# Altium PCB EPS 2023-24.PcbDoc (part 2 of 2)
Units mm, origin at the board's own origin, x right, y up, seen from the top; angles counter-clockwise.
Board outline 95.88 x 90.17 mm, 2 copper layers (Top, Bottom); 258 components, 125 nets, 766 pads, 194 vias.
Unrouted connection lines stored in the file: 96.
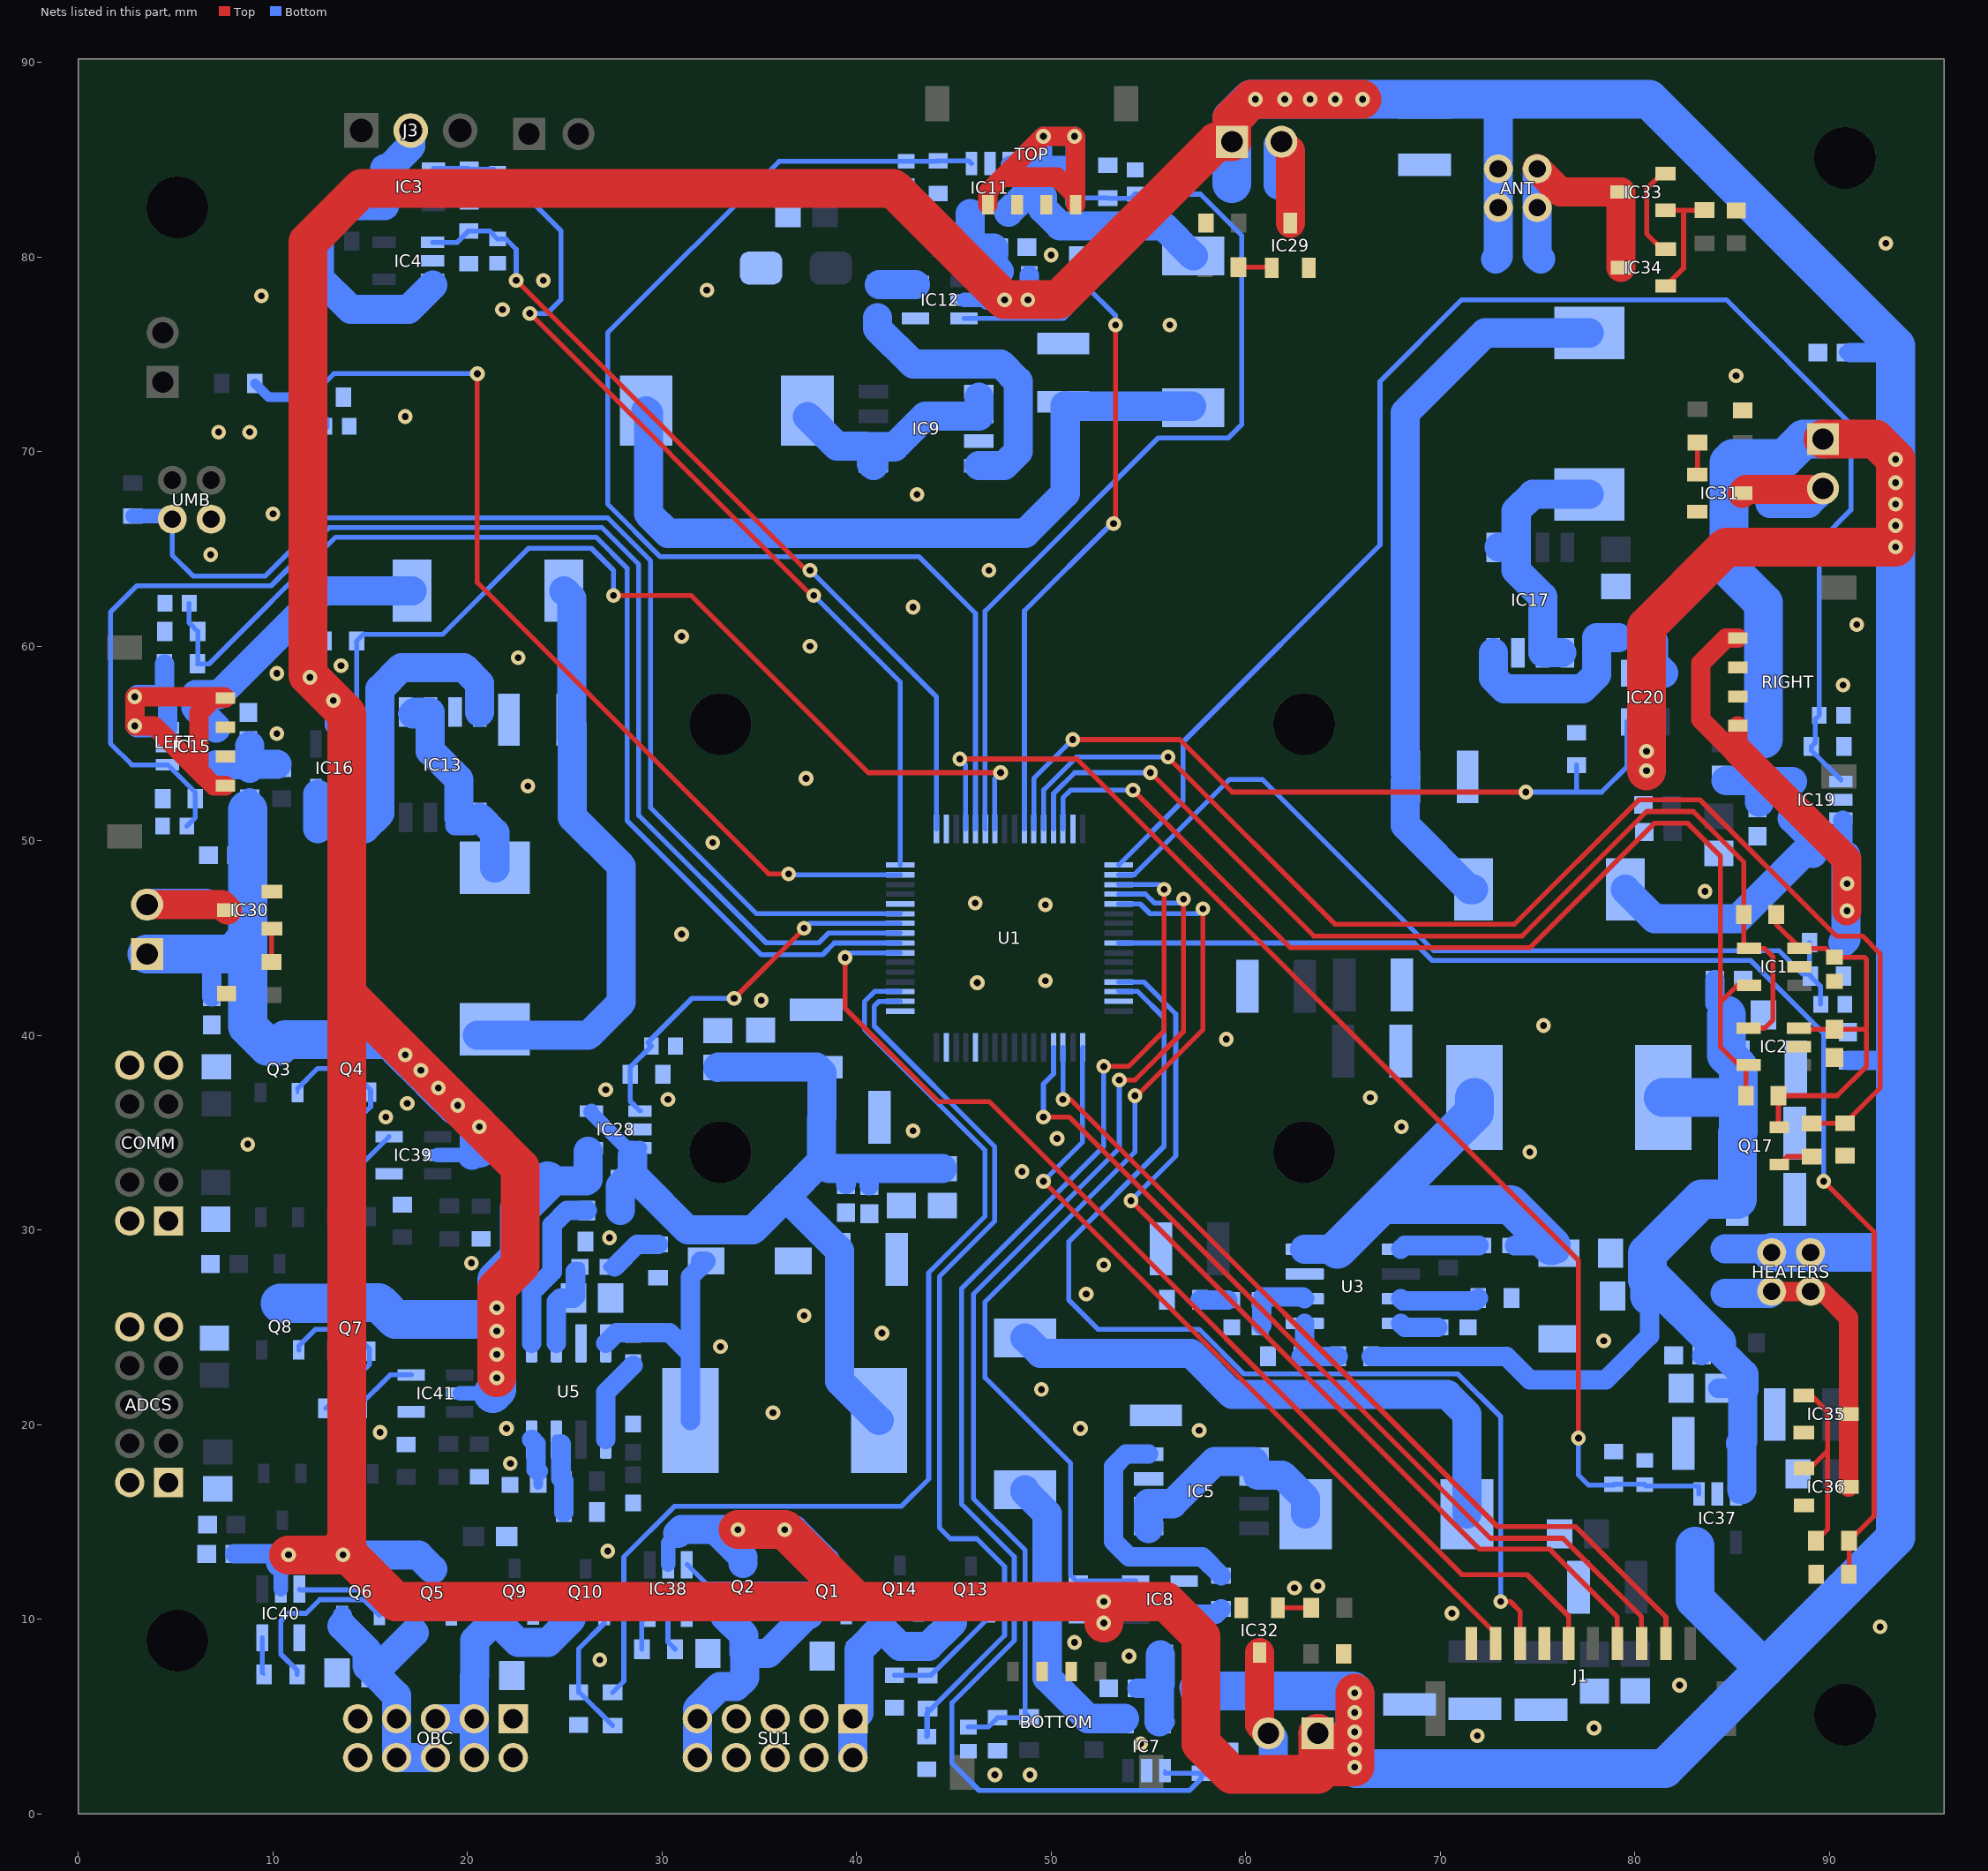
[diagram p2: the nets of this part, all layers, seen from the top]

## Via types
v1: diameter 0.756/0.756 (per signal layer), hole 0.35, Top to Bottom, 194 vias

## Nets (pads, with @x,y where several pads share a name; then routed paths per layer and width w, separated by ;. In a path a pad name is that pad's centre, name@x,y a point inside that pad or via, vN(x,y) a via of type N, cw(c..) or ccw(c..) an arc to the next point about the centre after c; other vN are vias at no path point) (continued)
GND: ADCS.1 ADCS.2 ADCS.9 ADCS.10 BOTTOM.2 BOTTOM.3 C1.1 C2.1 C3.1 C4.1 C5.1 C6.1 C7.1 C8.1 C9.1 C10.1 C11.1 C12.1 C13.1 C14.2 C15.1 C16.1 C17.2 C18.1 C19.1 C20.2 C21.1 C22.1 C23.2 C24.1 C25.1 C26.1 C27.1 C28.1 C29.1 C30.1 C31.1 C32.1 C33.1 C34.1 C35.1 C36.1 C37.1 C38.1 C39.1 C40.2 C41.2 C42.1 C43.1 C44.2 C45.1 C46.2 C47.1 C49.1 C50.1 C51.2 C52.2 C53.1 C54.1 C55.1 C56.1 C57.1 C61.1 C62.1 C63.2 C64.2 C65.1 C66.1 C67.1 C70.1 C71.1 C72.1 C73.1 C74.1 C75.1 C76.1 C77.1 C78.2 C79.1 C81.1 C82.1 C83.2 C85.2 C87.2 C88.2 C89.2 C90.1 C91.2 C93.1 COMM.1 COMM.2 COMM.9 COMM.10 D1.A D8.A D9.2 IC1.2 IC2.2 IC3.2 IC4.2 IC5.3 IC7.2 IC8.4 IC9.3 IC11.2 IC12.4 IC13.3 IC15.2 IC16.4 IC17.3 IC19.2 IC20.4 IC28.2 IC29.2 IC30.2 IC31.2 IC32.2 IC33.2 IC34.2 IC35.2 IC36.2 IC37.2 IC38.4 IC39.4 IC40.4 IC41.4 J1.7 J1.10 LEFT.2 LEFT.3 OBC.1 OBC.2 OBC.9 OBC.10 R2.1 R4.1 R7.2 R10.1 R13.1 R14.2 R15.1 R20.1 R22.1 R23.1 R24.1 R30.1 R32.1 R33.1 R34.1 R40.1 R42.1 R43.1 R44.1 R46.2 R51.1 R53.1 R55.1 R57.1 R59.1 R61.2 R63.2 R68.1 R70.2 R72.2 R74.2 R76.2 R81.1 R82.1 R83.1 R86.2 R89.1 RIGHT.2 RIGHT.3 SU1.3 SU1.4 SU1.5 SU1.6 SU1.7 SU1.8 TOP.2 TOP.3 U1.12 U1.18 U1.31 U1.47 U1.60 U1.63 U3.7 U5.7 UMB.4 | length 4.9
  Top w0.254: IC33.2@81.57,84.29 81.39,84.29 80.6,83.5 80.6,81.19 81.38,80.41 IC34.2@81.58,80.41
  other v1: 47.1,2 48.9,2 54.6,3.6 71.9,4 77.9,4.4 82.3,6.6 26.8,7.9 54,8.1 51.2,8.8 92.6,9.6 70.6,10.3 62.5,11.6 63.7,11.7 27.2,13.5 22.2,18 15.5,19.6 57.6,19.7 22,19.8 51.5,19.8 35.7,20.6 49.5,21.8 33,24 78.4,24.3 41.3,24.7 37.3,25.6 51.8,26.7 52.7,28.2 20.2,28.3 27.3,29.6 48.5,33 74.6,34 8.7,34.4 50.3,34.7 42.9,35.1 68,35.3 15.8,35.8 16.9,36.5 30.3,36.7 66.4,36.8 27.1,37.2 59,39.8 75.3,40.5 35.1,41.8 46.2,42.7 49.7,42.8 31,45.2 49.7,46.7 46.1,46.8 83.6,47.4 32.6,49.9 23.1,52.8 37.4,53.2 10.2,55.5 90.7,58 10.2,58.6 13.5,59 22.6,59.4 37.6,60 31,60.5 91.4,61.1 42.9,62 46.8,63.9 6.8,64.7 10,66.8 43.1,67.8 7.2,71 8.8,71 16.8,71.8 85.2,73.9 56.1,76.5 21.8,77.3 9.4,78 32.3,78.3 23.9,78.8 50,80.1 92.9,80.7
HEATERS: R62.1 R63.1 U1.41 | length 67.6
  Top w0.254: v1(89.7,32.5) 92.3,29.9 92.3,15.307 R62.1@91.013,14.02 91.013,12.326 R63.1@90.997,12.31
  Bottom w0.254: U1.41@53.473,44.746 68.673,44.746 69.573,43.846 85.953,43.846 89.7,40.1 v1(89.7,32.5)
I2CRESET: R85.1 R86.1 U1.28 | length 66.3
  Top w0.254: v1(56,54.3) 64.6,45.7 73.8,45.7 80.2,52.1 83.352,52.1 90.352,45.1 91.7,45.1 92.6,44.2 92.6,37.287 R86.1@90.8,35.487 89.104,35.487 R85.1@89.09,35.473
  Bottom w0.254: U1.28@49.613,50.613 49.613,52.613 51.3,54.3 v1(56,54.3)
I3_3V: C10.2 IC37.1 R68.2 U1.20 | length 64.2
  Top w0.254: v1(45.3,54.2) 51.33,54.2 77.1,28.43 v1(77.1,19.3)
  Bottom w0.254: v1(45.3,54.2) 45.599,53.901 U1.20@45.599,50.613 ; v1(77.1,19.3) 77.1,17.4 77.61,16.89 78.943,16.89 78.9,16.933 80.485,16.933 C10.2@80.51,16.908 80.578,16.84 83.29,16.84 IC37.1@83.29,16.44
I5V: C1.2 IC28.1 R51.2 U1.10 | length 19.8
  Top w0.254: v1(33.7,41.9) v1(37.3,45.5)
  Bottom w0.254: IC28.1@28.87,36.11 28.363,36.617 28.363,37.99 28.363,38.365 C1.2@29.448,39.45 29.267,39.631 31.536,41.9 v1(33.7,41.9) ; v1(37.3,45.5) 37.562,45.762 U1.10@42.247,45.762
IBAT+: C13.2 IC3.1 R2.2 U1.16 | length 49.6
  Top w0.254: v1(23.2,77.1) 37.7,62.6 v1(37.8,62.6)
  Bottom w0.254: IC3.1@18.24,84.55 20.037,84.55 R2.2@20.09,84.497 21.345,84.497 C13.2@21.54,84.302 21.84,84.302 24.8,81.342 24.8,77.8 24.1,77.1 v1(23.2,77.1) ; v1(37.8,62.6) 42.247,58.153 U1.16@42.247,48.759
IBAT-: C9.2 IC4.1 R7.1 U1.17 | length 43.8
  Top w0.254: v1(22.5,78.8) 37.4,63.9 v1(37.6,63.9)
  Bottom w0.254: IC4.1@18.21,80.75 19.473,80.75 R7.1@20.06,81.337 21.125,81.337 C9.2@21.54,80.922 21.978,80.922 22.5,80.4 v1(22.5,78.8) ; v1(37.6,63.9) 44.101,57.399 U1.17@44.101,50.613
INCURRENT1: C7.2 IC19.1 R40.2 U1.33 | length 78.8
  Bottom w0.152: IC19.1@90.59,53.05 IC19.1@90.59,53.123
  Bottom w0.254: U1.33@53.473,48.759 56.773,52.059 56.773,55.073 66.9,65.2 66.9,73.6 71.1,77.8 84.7,77.8 91.1,71.4 91.1,67 89.478,65.378 C7.2@89.478,56.45 89.273,56.245 89.273,55.04 R40.2@89.073,54.84 89.073,54.64 IC19.1@90.59,53.123
INCURRENT2: C2.2 IC15.1 R30.2 U1.9 | length 73.1
  Bottom w0.254: C2.2@5.572,50.75 6.007,51.185 R30.2@6.007,52.16 6.007,52.473 IC15.1@4.58,53.9 2.743,53.9 1.643,55 1.643,61.743 3,63.1 9.9,63.1 12.9,66.1 26.9,66.1 28.8,64.2 28.8,51.3 35.346,44.754 38.047,44.754 38.547,45.254 U1.9@42.247,45.254
INCURRENT3: C11.2 IC11.1 R20.2 U1.21 | length 63.5
  Bottom w0.254: IC11.1@45.9,84.8 45.763,84.937 R20.2@44.19,84.937 44.165,84.912 C11.2@42.54,84.912 36.012,84.912 27.2,76.1 27.2,67.3 29.9,64.6 43.2,64.6 46.107,61.693 U1.21@46.107,50.613
INCURRENT4: C5.2 IC7.1 R10.2 U1.35 | length 72.3
  Top w0.254: v1(52.7,38.4) 53.969,38.4 55.8,40.231 v1(55.8,47.5)
  Bottom w0.152: IC7.1@55.85,2.22 55.85,2.1 IC7.1@55.867,2.083 ; R10.2@57.71,2.083 R10.2@57.775,2.018
  Bottom w0.254: v1(52.7,38.4) 52.7,34.3 45.4,27 45.4,15.9 48.1,13.2 48.1,8.9 44.9,5.7 44.9,2.592 46.3,1.192 57.095,1.192 57.71,1.807 R10.2@57.71,2.083 IC7.1@55.867,2.083 ; U1.35@53.473,47.743 55.557,47.743 v1(55.8,47.5) ; R10.2@57.775,2.018 C5.2@59.2,2.018
LEFT: IC15.3 LEFT.1 LEFT.4 R29.1 R31.2 | length 25.1
  Top w1: LEFT.4@7.56,52.83 6.96,52.83 6.2,53.59 ; 6.2,53.59 3.89,55.9 v1(2.9,55.9) v1(2.9,57.4) 7.49,57.4 LEFT.1@7.56,57.33 6.96,57.33 6.2,56.57 6.2,53.59
  Bottom w0.254: v1(2.9,55.9) 4.48,55.9 IC15.3@4.58,55.8 ; R31.2@4.42,59.09 R31.2@4.43,59.08
  Bottom w1: v1(2.9,55.9) 2.998,55.802 4.58,55.802 4.58,57.36 R29.1@4.43,57.51 ; v1(2.9,57.4) 3.01,57.51 R29.1@4.43,57.51 ; R31.2@4.43,59.08 R29.1@4.43,57.51
N$1: C49.2 C50.2 C51.1 C52.1 C53.2 C54.2 C55.2 C85.1 C89.1 IC28.3 IC28.5 L7.1 R45.1 R50.1 | length 52.2
  Bottom w0.254: IC28.3@28.574,34.21 IC28.3@28.87,34.21
  Bottom w0.75: IC28.5@26.37,36.11 26.322,36.062 28.174,34.21 IC28.3@28.574,34.21 ; R50.1@27.79,32.69 R50.1@27.79,32.59 ; R50.1@28.19,32.59 R50.1@27.79,32.59 ; 28.474,33.814 IC28.3@28.87,34.21 IC28.3@28.81,34.21 ; 28.727,32.59 R50.1@27.79,32.59
  Bottom w1: C49.2@39.45,32.334 39.45,33 39.6,33.15 ; 40.5,33.15 40.65,33 C50.2@40.65,32.284
  Bottom w1.5: R45.1@27.853,31 27.853,32.253 28.19,32.59 28.474,32.874 28.474,33.814 ; 28.727,32.59 31.316,30.001 34.658,30.001 36.358,31.701 ; C51.1@32.86,38.35 32.88,38.37 C52.1@35.06,38.37 35.065,38.365 C54.2@37.92,38.365 38.215,38.07 C55.2@38.215,35.78 38.189,35.754 38.189,33.532 ; L7.1@41.15,20.2 39.115,22.235 C53.2@39.115,28.48 39.115,28.944 36.358,31.701 ; C85.1@44.4,33.15 C89.1@42.3,33.15 40.5,33.15 39.6,33.15 38.571,33.15 38.189,33.532 ; 36.358,31.701 38.189,33.532
N$2: C47.2 C61.2 C62.2 C63.1 C64.1 C65.2 C66.2 C67.2 C87.1 C88.1 IC37.3 L8.1 R12.1 R67.1 | length 58.1
  Bottom w0.5: IC37.3@85.19,16.44 IC37.3@85.29,16.44
  Bottom w1: R12.1@66.453,23.5 73.4,23.5 74.6,22.3 78.5,22.3 80.75,24.55 C87.1@80.75,26.6 ; C61.2@83.434,23.55 83.651,23.767 84.412,23.767 84.412,23.972 R67.1@84.64,24.2 84.2,24.2 ; C62.2@84.116,42.85 84.116,41.634 C63.1@84.71,41.04 ; C64.1@84.27,21.86 85.54,21.86 85.6,21.8 85.535,21.735 ; IC37.3@85.29,16.44 85.49,16.64 ; C47.2@85.435,19.02 85.435,18.92 C47.2@85.49,18.865
  Bottom w1.5: R67.1@84.412,24.067 84.412,23.767 85.6,22.58 85.6,21.8 ; C47.2@85.435,19.02 85.535,19.12 85.535,21.735 ; 85.49,16.64 C47.2@85.49,18.865
  Bottom w2: C87.1@80.75,26.6 80.75,27.35 ; L8.1@81.45,36.8 85.215,36.8 85.315,36.7 ; 84.2,24.2 80.9,27.5 80.75,27.35 ; C63.1@84.71,41.04 84.71,38.985 C66.2@85.315,38.38 85.315,36.7 ; 80.75,27.35 80.652,27.447 80.652,27.827 80.65,27.83 C88.1@80.65,28.8 83.43,31.58 C67.2@85.265,31.58 C65.2@85.265,34.98 85.315,35.03 85.315,36.7
N$4: ANT.1 ANT.2 D6.2 IC33.3 IC34.3 | length 13.4
  Top w0.152: IC33.3@79.27,83.34 IC33.3@79.28,83.33
  Top w1.5: ANT.1@74.98,84.53 76.17,83.34 IC33.3@79.27,83.34 ; IC34.3@79.28,79.46 IC33.3@79.28,83.33
  Bottom w1.5: ANT.1@74.98,84.53 ANT.2@74.98,82.53 74.98,80.06 D6.2@75.15,79.89
N$6: D7.2 HEATERS.1 HEATERS.2 IC35.3 IC36.3 | length 15.7
  Top w1: HEATERS.2@87.03,26.84 HEATERS.1@89.03,26.84 89.633,26.84 90.98,25.493 IC35.3@90.98,20.54 90.98,16.8 IC36.3@90.99,16.79
  Bottom w1.5: D7.2@84.64,26.73 86.92,26.73 HEATERS.2@87.03,26.84
N$7: R33.2 R35.1 U3.3 | length 4.1
  Bottom w1: U3.3@67.97,26.465 68.088,26.347 R35.1@70.4,26.347 71.794,26.347 R33.2@71.947,26.5
N$8: C4.2 C78.1 IC1.3 IC2.3 Q17.2 R87.2 R88.2 | length 21.7
  Top w0.254: R88.2@87.267,46.2 87.267,45.7 88.455,44.512 88.502,44.512 IC1.3@88.46,44.47 89.792,44.47 C4.2@90.25,44.012 91.788,44.012 91.9,43.9 91.9,40.314 ; Q17.2@87.42,35.275 87.377,35.318 R87.2@87.377,36.9 90.4,36.9 91.9,38.4 91.9,40.314 ; IC2.3@88.44,40.37 88.496,40.314 C78.1@90.25,40.314 91.9,40.314
N$9: C80.2 U3.1 | length 4.3
  Bottom w0.5: C80.2@71.976,29.2 C80.2@72.176,29.2
  Bottom w1: U3.1@67.97,29.005 68.165,29.2 C80.2@71.976,29.2
N$10: R12.2 R14.1 U3.5 | length 3.7
  Bottom w1: U3.5@63.03,25.195 63.03,23.677 R14.1@62.853,23.5 R12.2@64.747,23.5
N$11: C84.1 R23.2 | length 1.6
  Bottom w0.5: C84.1@59.076,26.4 C84.1@59.276,26.4
  Bottom w1: R23.2@57.653,26.4 C84.1@59.076,26.4
N$12: C81.2 U3.4 | length 2.1
  Bottom w0.5: C81.2@69.876,25 C81.2@69.976,25
  Bottom w1: U3.4@67.97,25.195 68.165,25 C81.2@69.876,25
N$13: C80.1 D9.1 L8.2 U3.8 | length 24.6
  Bottom w0.5: C80.1@73.624,29.2 C80.1@73.824,29.2
  Bottom w1: C80.1@73.824,29.2 75.7,29.2 D9.1@76.1,28.8
  Bottom w1.5: U3.8@63.03,29.005 64.705,29.005
  Bottom w2: 64.705,29.005 67,31.3 ; L8.2@71.75,36.8 71.75,36.05 67,31.3 ; D9.1@75.7,29.2 73.6,31.3 67,31.3
N$14: C82.2 C84.2 U3.6 | length 3.9
  Bottom w0.5: C82.2@60.724,25 C82.2@60.824,25.1 ; C84.2@60.824,26.3 C84.2@60.724,26.4 C84.2@60.889,26.565
  Bottom w1: C82.2@60.824,25.1 C84.2@60.824,26.3 ; C84.2@60.889,26.565 62.93,26.565 U3.6@63.03,26.465
N$16: C92.1 R89.2 | length 3.1
  Bottom w0.5: C92.1@27.224,28.1 C92.1@27.554,28.1
  Bottom w1: C92.1@27.554,28.1 28.707,29.253 R89.2@29.8,29.253
N$17: R45.2 R46.1 U5.5 | length 8.6
  Bottom w1: U5.5@23.295,24.17 23.295,26.795 24.347,27.847 24.347,29.4 24.347,30.247 25.1,31 R45.2@26.147,31
N$19: IC3.4 IC3.5 IC4.3 J3.2 R1.1 | length 18.3
  Bottom w0.75: IC4.3@18.21,78.55 IC4.3@18.21,78.85
  Bottom w1.5: J3.2@17.08,86.5 17.08,85.69 15.84,84.45 IC3.5@15.74,84.55 IC3.4@15.74,82.65 13.623,82.65 12.383,81.41 R1.1@12.383,80.81 12.383,78.913 13.999,77.3 16.96,77.3 IC4.3@18.21,78.55
N$20: IC5.1 IC5.2 IC5.5 IC5.6 L1.1 | length 13.8
  Bottom w0.75: IC5.6@60.422,17.205 IC5.5@60.422,18.475
  Bottom w1: 60.422,18.105 IC5.6@60.422,17.205 IC5.6@60.622,17.405
  Bottom w1.5: IC5.1@54.998,14.665 IC5.2@54.998,15.935 56.235,15.935 58.405,18.105 60.422,18.105 ; IC5.6@60.622,17.405 61.869,17.405 63.074,16.2 L1.1@63.074,15.4
N$21: IC8.5 R8.1 | length 2.1
  Bottom w1: IC8.5@56.84,10.06 57.04,10.26 58.463,10.26 R8.1@58.73,10.527
N$22: IC5.4 R8.2 | length 12.2
  Bottom w1: IC5.4@54.998,18.475 53.832,18.475 53.2,17.843 53.2,14 54,13.2 57.763,13.2 R8.2@58.73,12.233
N$23: C16.2 IC6.2 L1.2 | length 29.8
  Bottom w0.254: C16.2@55.38,23.459 C16.2@55.38,23.659
  Bottom w0.75: C16.2@55.38,23.459 C16.2@55.58,23.659
  Bottom w1.5: IC6.2@48.65,24.45 49.441,23.659 C16.2@55.38,23.659 ; C16.2@55.58,23.659 57.18,23.659 59.297,21.541 70.359,21.541 71.367,20.533 L1.2@71.367,15.4
N$24: IC6.1 IC7.4 R9.2 | length 15.2
  Bottom w0.152: IC7.4@53.78,4.89 IC7.4@53.95,4.72
  Bottom w1.5: IC6.1@48.65,16.65 48.65,16.55 49.79,15.41 49.79,6.99 51.89,4.89 R9.2@52.19,4.89 IC7.4@53.78,4.89
N$25: C93.2 U5.4 | length 2.5
  Bottom w0.5: C93.2@23.624,16.9 23.624,17.6
  Bottom w1: U5.4@23.295,19.23 23.524,19.001 23.524,17.7 23.624,17.6
N$26: C91.1 C92.2 U5.6 | length 4.8
  Bottom w0.5: C92.2@25.55,27.874 C92.2@25.776,28.1
  Bottom w1: U5.6@24.565,24.17 24.565,26.315 24.75,26.5 C91.1@25.45,26.5 25.55,26.6 C92.2@25.55,27.874
N$27: C15.2 IC7.5 R5.1 R6.1 | length 5.7
  Bottom w0.152: R6.1@55.605,8.16 55.645,8.2 R6.1@55.845,8.2 ; R5.1@55.745,6.44 R5.1@55.805,6.5
  Bottom w1: C15.2@54.404,6.44 R5.1@55.745,6.44 ; IC7.5@55.55,4.72 IC7.5@55.85,4.72 ; R5.1@55.55,6.345 55.705,6.5 R5.1@55.805,6.5 R5.1@55.605,6.7
  Bottom w1.5: IC7.5@55.55,4.72 R5.1@55.55,6.345 ; R5.1@55.605,6.7 R6.1@55.605,8.16
N$28: C86.1 D8.C L7.2 U5.8 | length 13.9
  Bottom w0.5: C86.1@28.4,24.724 C86.1@28.5,24.624 C86.1@28.6,24.724
  Bottom w1: U5.8@27.105,24.17 27.659,24.724 C86.1@28.4,24.724 ; C86.1@28.6,24.724 30.376,24.724 31.45,23.65 ; L7.2@31.45,20.2 31.45,23.65 ; D8.C@31.976,28.4 D8.C@32.26,28.4 31.45,27.59 31.45,23.65
N$30: IC9.1 IC9.2 IC9.5 IC9.6 L2.1 | length 14.1
  Bottom w0.254: L2.1@37.467,71.8 L2.1@37.467,72.1 ; IC9.1@46.282,72.785 IC9.1@46.282,73.085
  Bottom w0.75: IC9.6@40.758,70.245 40.858,70.345 IC9.6@40.858,70.545 IC9.6@40.858,70.245
  Bottom w1.5: L2.1@37.467,71.8 38.992,70.275 40.458,70.275 40.858,69.875 IC9.5@40.858,69.275 40.758,69.375 IC9.6@40.758,70.245 ; IC9.6@40.858,70.245 41.945,70.245 43.515,71.815 IC9.2@46.282,71.815 IC9.1@46.282,72.785
N$31: C86.2 U5.1 | length 4.5
  Bottom w0.5: C86.2@28.5,23.046 C86.2@28.5,23.176
  Bottom w1: U5.1@27.105,19.23 27.105,21.651 C86.2@28.5,23.046
N$32: IC9.4 R18.2 | length 14.9
  Bottom w0.75: R18.2@41.07,76.877 R18.2@41.07,76.977
  Bottom w1.5: R18.2@41.07,76.877 41.07,76.33 42.9,74.5 47.4,74.5 48.3,73.6 48.3,70 47.575,69.275 IC9.4@46.282,69.275
N$33: IC12.5 R18.1 | length 2.1
  Bottom w0.254: IC12.5@43.02,78.583 IC12.5@43.02,78.74
  Bottom w0.75: R18.1@41.07,78.683 R18.1@41.17,78.583
  Bottom w1.5: R18.1@41.17,78.583 IC12.5@43.02,78.583
N$34: C19.2 IC10.2 L2.2 | length 39.6
  Bottom w0.254: IC10.2@57.22,72.33 IC10.2@57.3,72.25
  Bottom w0.75: C19.2@50.72,72.361 50.62,72.461 C19.2@50.62,72.561 C19.2@50.851,72.33
  Bottom w1.5: L2.2@29.173,72.1 29.3,71.973 29.3,66.8 30.3,65.8 48.659,65.8 50.72,67.861 C19.2@50.72,72.361 ; C19.2@50.851,72.33 IC10.2@57.22,72.33
N$35: IC10.1 IC11.4 R19.2 | length 11.4
  Bottom w1.5: IC11.4@47.8,82.3 48.59,83.09 R19.2@49.56,83.09 49.56,82.49 50.45,81.6 55.75,81.6 IC10.1@57.3,80.05
N$37: C18.2 IC11.5 R16.1 R17.1 | length 5
  Bottom w0.254: IC11.5@45.825,82.225 IC11.5@45.9,82.3
  Bottom w0.75: C18.2@46.996,80.41 47.196,80.41 C18.2@47.296,80.51 ; R16.1@47.335,79.05 R16.1@47.335,79.25
  Bottom w1.5: IC11.5@45.825,82.225 R17.1@45.825,80.5 45.876,80.449 C18.2@47.035,80.449 ; C18.2@46.996,80.41 C18.2@47.035,80.449 ; R16.1@47.335,79.25 47.035,79.55 C18.2@47.035,80.449
N$38: R25.1 R43.2 U5.3 | length 3.9
  Bottom w0.5: U5.3@24.565,19.23 U5.3@24.8,18.995
  Bottom w1: U5.3@24.8,18.995 24.8,17.247 R25.1@24.947,17.1 R43.2@24.947,15.5
N$42: IC13.1 IC13.2 IC13.5 IC13.6 L3.1 | length 12.8
  Bottom w0.254: IC13.6@19.355,50.788 IC13.6@19.355,51.188
  Bottom w0.75: IC13.1@16.815,56.612 IC13.1@16.915,56.512
  Bottom w1: IC13.1@16.915,56.512 17.185,56.512 ; IC13.6@19.355,50.788 20.225,50.788 IC13.5@20.625,51.188 ; IC13.6@19.525,50.788 19.525,51.018 IC13.6@19.355,51.188 IC13.6@19.555,51.188
  Bottom w1.5: 17.185,56.512 17.285,56.612 IC13.2@18.085,56.612 18.085,54.615 19.555,53.145 IC13.6@19.555,51.188 ; IC13.5@20.625,51.188 21.4,50.413 L3.1@21.4,48.606
N$43: IC13.4 R28.2 | length 15.6
  Bottom w1.5: R28.2@14.013,50.62 14.713,50.62 15.5,51.407 15.5,57.8 16.6,58.9 19.8,58.9 20.625,58.075 IC13.4@20.625,56.612
N$44: IC16.5 R28.1 | length 1.9
  Bottom w0.254: IC16.5@12.21,52.48 IC16.5@12.307,52.383
  Bottom w1.5: R28.1@12.307,50.62 IC16.5@12.307,52.383
N$45: C22.2 IC14.2 L3.2 | length 34.9
  Bottom w0.254: L3.2@20.5,40 20.2,40.3 21.387,40.3 L3.2@21.4,40.313 ; C22.2@25.35,55.289 24.85,55.789 24.85,56.489 C22.2@25.119,56.22 C22.2@25.38,55.958
  Bottom w1.5: L3.2@20.5,40 26.2,40 27.9,41.7 27.9,48.7 25.38,51.22 C22.2@25.38,55.958 ; IC14.2@24.95,62.85 25.35,62.45 C22.2@25.35,55.289
N$46: IC14.1 IC15.4 R29.2 | length 15.5
  Bottom w1.5: IC15.4@7.08,55.8 6.03,56.85 R29.2@6.03,57.51 7.23,57.51 12.57,62.85 IC14.1@17.15,62.85
N$48: C21.2 IC15.5 R26.1 R27.1 | length 5.1
  Bottom w0.254: R26.1@8.635,53.9 R26.1@8.8,53.735 ; C21.2@8.74,55.146 8.74,54.946 C21.2@8.8,54.886 ; R27.1@10.21,53.935 R27.1@10.45,53.695
  Bottom w1.5: IC15.5@7.08,53.9 R26.1@8.635,53.9 ; C21.2@8.8,54.886 R26.1@8.8,53.735 9,53.935 R27.1@10.21,53.935
N$53: IC17.1 IC17.2 IC17.5 IC17.6 L4.1 | length 14.7
  Bottom w0.75: IC17.5@72.725,65.082 72.825,65.182 72.925,65.182 IC17.5@73.025,65.082 ; IC17.6@73.795,64.982 73.895,65.082 IC17.6@73.995,65.082 ; IC17.1@76.235,59.658 IC17.1@76.535,59.658
  Bottom w1.5: IC17.5@73.025,65.082 73.895,65.082 73.895,66.948 74.751,67.804 L4.1@77.65,67.804 ; IC17.6@73.795,64.982 73.895,64.982 73.895,63.905 75.265,62.535 IC17.2@75.265,59.658 IC17.1@76.235,59.658
N$54: IC17.4 R38.2 | length 10.1
  Bottom w1.5: IC17.4@72.725,59.658 72.725,58.375 73.3,57.8 77.3,57.8 78.03,58.53 78.03,60.43 R38.2@79.147,60.43
N$55: IC20.5 R38.1 | length 2.1
  Bottom w0.254: R38.1@80.853,60.43 80.853,60.33 R38.1@80.953,60.23
  Bottom w1.5: R38.1@80.953,60.23 80.953,59.147 IC20.5@81.49,58.61
N$56: C25.2 IC18.2 L4.2 | length 37.4
  Bottom w0.75: C25.2@68.2,53.079 C25.2@68.401,53.28 C25.2@68.201,53.48
  Bottom w1.5: C25.2@68.2,53.079 68.2,50.8 71.5,47.5 IC18.2@71.7,47.5 ; C25.2@68.201,53.48 68.201,72.001 72.297,76.097 L4.2@77.65,76.097
N$57: IC18.1 IC19.4 R39.2 | length 13.9
  Bottom w0.152: 88.64,49.34 R39.2@89.15,49.34
  Bottom w1.5: IC18.1@79.5,47.5 81,46 85.3,46 88.64,49.34 ; IC19.4@88.09,51.15 89.15,50.09 R39.2@89.15,49.34
N$59: C24.2 IC19.5 R36.1 R37.1 | length 6
  Bottom w0.152: R37.1@84.45,53.435 84.45,53.335 R37.1@84.69,53.095
  Bottom w0.75: R36.1@86,53.095 R36.1@86.3,53.395 86.3,53.295 R36.1@86.545,53.05 ; C24.2@86.3,51.684 86.3,51.884 C24.2@86.4,51.984
  Bottom w1.5: R37.1@84.69,53.095 86,53.095 86.4,53.095 C24.2@86.4,51.984 ; R36.1@86.545,53.05 IC19.5@88.09,53.05
N$69: D2.2 DEPT.2 IC29.3 | length 6.7
  Top w1.5: DEPT.2@61.83,85.92 62.29,85.46 IC29.3@62.29,81.74
  Bottom w0.152: DEPT.2@61.67,85.76 DEPT.2@61.83,85.92
  Bottom w1.5: D2.2@61.67,83.7 DEPT.2@61.67,85.76
N$70: IC29.1 R52.1 | length 1.7
  Top w0.152: IC29.1@61.31,79.47 IC29.1@61.34,79.44
  Top w0.254: R52.1@59.613,79.47 IC29.1@61.31,79.47
N$76: D3.2 DEPL.2 IC30.3 | length 7.3
  Top w1.5: DEPL.2@3.53,46.72 7.37,46.72 IC30.3@7.65,46.44
  Bottom w1.5: DEPL.2@3.53,46.72 3.6,46.79 D3.2@6.55,46.79
N$78: IC30.1 R54.1 | length 1.7
  Top w0.152: IC30.1@9.93,45.47 IC30.1@9.95,45.49
  Top w0.254: R54.1@9.93,43.773 IC30.1@9.93,45.47
N$80: D4.2 DEPR.2 IC31.3 | length 7.3
  Top w1.5: IC31.3@85.51,67.86 85.71,68.06 89.63,68.06 DEPR.2@89.67,68.1
  Bottom w1.5: D4.2@86.94,67.34 88.91,67.34 DEPR.2@89.67,68.1
N$82: IC31.1 R56.1 | length 1.7
  Top w0.152: IC31.1@83.21,68.81 IC31.1@83.22,68.82
  Top w0.254: IC31.1@83.22,68.82 R56.1@83.22,70.467
N$84: D5.2 DEPB.2 IC32.3 | length 6.8
  Top w1.5: IC32.3@60.71,8.28 60.71,4.58 DEPB.2@61.16,4.13
  Bottom w1.5: DEPB.2@61.16,4.13 61.42,3.87 D5.2@61.42,1.81
N$86: IC32.1 R58.1 | length 1.7
  Top w0.254: IC32.1@61.66,10.58 R58.1@63.357,10.58
N$91: IC33.1 IC34.1 R60.2 | length 6.3
  Top w0.152: IC33.1@81.57,82.39 IC33.1@81.583,82.403
  Top w0.254: IC34.1@81.58,78.51 82.5,79.43 82.5,82.403 ; IC33.1@81.583,82.403 82.5,82.403 ; R60.2@83.57,82.403 82.5,82.403
N$93: IC35.1 IC36.1 R62.2 | length 10
  Top w0.254: IC35.1@88.68,21.49 89.08,21.49 89.9,20.67 89.9,18.65 ; IC36.1@88.69,17.74 88.99,17.74 89.9,18.65 ; R62.2@89.307,14.02 89.9,14.613 89.9,18.65
N$106: IC38.5 R69.1 | length 2
  Bottom w0.254: R69.1@28.957,8.46 28.957,9.897 IC38.5@29.36,10.3
N$107: Q1.1 Q2.1 R69.2 | length 13.3
  Bottom w0.254: R69.2@30.663,8.46 30.3,8.823 30.3,11 30.6,11.3 35,11.3 ; Q2.1@35.115,10.47 35.115,11.185 35,11.3 ; Q1.1@39.465,10.24 38.405,11.3 35,11.3
N$110: IC39.5 R71.1 | length 2.6
  Bottom w0.254: R71.1@13.89,33.497 14.667,33.497 IC39.5@15.96,34.79
N$111: Q3.1 Q4.1 R71.2 | length 7.3
  Bottom w0.152: Q3.1@11.265,37.05 Q3.1@11.265,37.265 ; Q4.1@15.015,37.08 Q4.1@15.015,37.185
  Bottom w0.254: Q3.1@11.265,37.265 12.3,38.3 13.9,38.3 Q4.1@15.015,37.185 ; R71.2@13.89,35.203 15.015,36.328 Q4.1@15.015,37.08
N$115: IC40.5 R73.1 | length 1.9
  Bottom w0.152: R73.1@9.45,7.247 R73.1@9.537,7.16
  Bottom w0.254: R73.1@9.45,7.247 IC40.5@9.45,9.04
N$116: Q5.1 Q6.1 R73.2 | length 13.3
  Bottom w0.254: R73.2@11.243,7.16 11.243,7.36 10.4,8.203 10.4,9.9 10.8,10.3 11.7,10.3 12.4,11 14.655,11 Q6.1@15.465,10.19 16.275,11 18.325,11 Q5.1@19.165,10.16
N$119: IC41.5 R75.1 | length 3.4
  Bottom w0.254: R75.1@14.423,20.84 14.423,20.95 16.023,22.55 IC41.5@17.1,22.55
N$120: Q7.1 Q8.1 R75.2 | length 8.6
  Bottom w0.254: Q8.1@11.325,23.83 11.325,24.03 12.195,24.9 13.935,24.9 14.965,23.87 Q7.1@14.965,23.77 14.965,23.088 R75.2@12.717,20.84
N$122: Q17.1 R85.2 | length 1.8
  Top w0.254: Q17.1@87.42,33.365 87.822,33.767 R85.2@89.09,33.767
NRST: J1.6 U1.7 | length 57.1
  Top w0.254: v1(39.4,44) 39.4,41.4 44.2,36.6 46.8,36.6 71.116,12.284 74.461,12.284 76.595,10.15 J1.6@76.595,8.755
  Bottom w0.254: v1(39.4,44) 39.638,44.238 U1.7@42.247,44.238
OBC_3_3V: C74.2 OBC.3 OBC.4 OBC.5 Q9.2 Q10.2 | length 15
  Bottom w0.152: C74.2@20.35,7.09 C74.2@20.37,7.11 ; Q9.2@21.328,10.073 Q9.2@21.427,9.973
  Bottom w1.5: OBC.5@18.35,4.88 OBC.3@20.35,4.88 ; OBC.4@20.35,2.88 OBC.3@20.35,4.88 ; C74.2@20.35,7.09 OBC.3@20.35,4.88 ; C74.2@20.37,7.11 20.37,8.915 21.427,9.973 22.6,8.8 24.125,8.8 25.315,9.99 Q10.2@25.115,10.19 ; Q9.2@21.328,10.073 Q9.2@21.465,10.21
OBC_5V: C72.2 OBC.6 OBC.7 OBC.8 Q5.2 Q6.2 | length 14.2
  Bottom w1: 13.555,9.651 Q6.2@13.555,10.19 ; 17.255,9.305 Q5.2@17.255,10.16
  Bottom w1.5: 13.555,9.651 14.842,8.364 14.842,7.587 C72.2@15.19,7.24 ; 17.255,9.305 C72.2@15.19,7.24 ; OBC.6@18.35,2.88 OBC.8@16.35,2.88 OBC.7@16.35,4.88 16.35,6.08 C72.2@15.19,7.24
OBC_ONOFF: R77.1 U1.3 | length 54.9
  Bottom w0.254: R77.1@27.46,6.233 28.031,6.804 28.031,13.195 30.637,15.8 42.3,15.8 43.7,17.2 43.7,27.8 46.6,30.7 46.6,34.095 40.395,40.3 40.395,41.726 40.926,42.257 U1.3@42.247,42.257
OBC_ONOFF2: IC40.3 Q9.1 Q10.1 R74.1 R77.2 | length 25
  Bottom w0.152: R74.1@25.7,6.237 R74.1@25.75,6.237
  Bottom w0.254: IC40.3@11.35,11.54 11.39,11.5 22.085,11.5 22.185,11.4 ; Q9.1@23.375,10.21 22.185,11.4 ; R74.1@25.7,6.237 25.7,8.465 27.025,9.79 Q10.1@27.025,10.19 27.025,10.375 26,11.4 22.185,11.4 ; R74.1@25.75,6.237 R77.2@27.46,4.527
PC3: R84.1 U1.11 UMB.3 | length 58.9
  Bottom w0.254: UMB.3@4.82,66.53 4.82,64.68 5.9,63.6 9.6,63.6 12.6,66.6 27.2,66.6 29.4,64.4 29.4,51.7 34.855,46.245 U1.11@42.247,46.245
  Bottom w0.75: R84.1@2.79,66.68 4.67,66.68 UMB.3@4.82,66.53
PWM1: IC20.3 R44.2 U1.27 | length 39.3
  Top w0.254: v1(51.1,55.2) 56.6,55.2 59.3,52.5 v1(74.4,52.5)
  Bottom w0.254: U1.27@49.105,50.613 49.105,53.205 v1(51.1,55.2) ; v1(74.4,52.5) 77,52.5 ; R44.2@77.01,53.883 77.01,52.51 77,52.5 ; IC20.3@79.59,56.11 79.59,53.8 78.29,52.5 77,52.5
PWM2: IC16.3 R34.2 U1.23 | length 49
  Top w0.254: v1(27.5,62.6) 31.5,62.6 40.6,53.5 v1(47.4,53.5)
  Bottom w0.254: IC16.3@14.11,54.98 14.297,55.167 R34.2@14.297,60.26 14.637,60.6 18.705,60.6 23.134,65.029 26.366,65.029 27.5,63.895 v1(27.5,62.6) ; U1.23@47.098,50.613 47.098,53.198 v1(47.4,53.5)
PWM3: IC12.3 R24.2 U1.26 | length 38
  Top w0.254: v1(53.2,66.3) 53.3,66.4 v1(53.3,76.5)
  Bottom w0.254: IC12.3@45.52,76.84 50.64,76.84 51.4,77.6 51.4,78.463 R24.2@51.41,78.473 51.827,78.473 53.3,77 v1(53.3,76.5) ; U1.26@48.622,50.613 48.622,61.822 53.1,66.3 v1(53.2,66.3)
PWM4: IC8.3 R15.2 U1.37 | length 49
  Top w0.254: v1(54.3,36.9) 54.4,36.9 57.8,40.3 v1(57.8,46.5)
  Bottom w0.152: IC8.3@54.337,11.957 IC8.3@54.34,11.96
  Bottom w0.254: U1.37@53.473,46.753 54.573,46.753 55.073,46.253 57.553,46.253 v1(57.8,46.5) ; v1(54.3,36.9) 54.3,34 46.6,26.3 46.6,22.4 51,18 51,12.247 R15.2@51.39,11.857 51.49,11.957 IC8.3@54.337,11.957
RIGHT: IC19.3 R39.1 R41.2 RIGHT.1 RIGHT.4 | length 29.5
  Top w0.254: 85.29,54.39 RIGHT.1@85.29,55.91
  Top w1: 85.29,54.39 85.262,54.362 83.39,56.233 83.39,59.11 84.69,60.41 RIGHT.4@85.29,60.41 ; 85.29,54.633 RIGHT.1@85.29,55.91
  Top w1.5: 85.29,54.633 90.9,49.023 v1(90.9,47.8) v1(90.9,46.4)
  Bottom w0.254: IC19.3@90.59,51.15 IC19.3@90.69,51.05 ; R39.1@90.85,49.24 90.85,47.85 v1(90.9,47.8)
  Bottom w1: R41.2@90.68,44.76 R41.2@90.735,44.815 ; IC19.3@90.69,51.05 90.69,49.4 R39.1@90.75,49.34 R39.1@90.85,49.24 ; v1(90.9,46.4) v1@90.912,46.412
  Bottom w1.5: R41.2@90.68,44.76 90.85,44.93 R39.1@90.85,49.24
RTS: J1.4 U1.45 | length 49.4
  Top w0.254: v1(54.1,31.5) 72,13.6 75.6,13.6 79.095,10.105 J1.4@79.095,8.755
  Bottom w0.254: U1.45@53.473,42.739 54.761,42.739 56.4,41.1 56.4,33.8 v1(54.1,31.5)
RX: J1.3 U1.52 | length 46.5
  Top w0.254: v1(49.6,35.8) 50.931,35.8 72.576,14.155 76.3,14.155 80.345,10.11 J1.3@80.345,8.755
  Bottom w0.254: v1(49.6,35.8) 49.6,37.5 50.121,38.02 U1.52@50.121,39.387
SCL: IC1.4 IC2.4 R88.1 U1.29 | length 55.6
  Top w0.254: v1(55.1,53.5) 63.5,45.1 74.2,45.1 80.6,51.5 83,51.5 85.6,48.9 85.6,46.207 R88.1@85.593,46.2 85.593,44.737 IC1.4@85.86,44.47 86.66,44.47 87.1,44.03 87.1,40.8 86.67,40.37 IC2.4@85.84,40.37
  Bottom w0.254: U1.29@50.121,50.613 50.121,52.421 51.2,53.5 v1(55.1,53.5)
SDA: IC1.5 IC2.5 R87.1 U1.30 | length 57.3
  Top w0.254: v1(54.2,52.6) 62.3,44.5 74.6,44.5 81,50.9 82.7,50.9 84.4,49.2 84.4,41.71 ; R87.1@85.703,36.9 85.703,38.333 IC2.5@85.84,38.47 85.33,38.47 84.4,39.4 84.4,41.71 ; IC1.5@85.86,42.57 85.26,42.57 84.4,41.71
  Bottom w0.254: U1.30@50.603,50.613 50.603,52.203 51,52.6 v1(54.2,52.6)
SU_3_3V: C76.2 Q13.2 Q14.2 SU1.1 SU1.2 | length 13.1
  Bottom w0.152: C76.2@40.11,8.08 C76.2@40.12,8.09
  Bottom w1.5: SU1.2@39.81,2.88 SU1.1@39.81,4.88 40.11,5.18 C76.2@40.11,8.08 ; C76.2@40.12,8.09 40.12,8.415 41.265,9.56 ; Q14.2@41.265,10.36 41.265,9.56 ; Q13.2@44.915,10.33 44.915,9.815 43.7,8.6 42.225,8.6 41.265,9.56
SU_5V: C70.2 Q1.2 Q2.2 SU1.9 SU1.10 | length 13.7
  Bottom w0.152: Q2.2@33.205,10.47 33.237,10.438 33.237,10.237 Q2.2@33.237,10.137
  Bottom w1.5: SU1.10@31.81,2.88 SU1.9@31.81,4.88 31.81,5.38 32.966,6.536 33.8,6.536 34.25,6.987 C70.2@34.25,8.24 ; Q2.2@33.237,10.137 34.202,9.173 34.202,8.288 C70.2@34.25,8.24 ; Q1.2@37.555,10.24 37.455,10.24 35.455,8.24 C70.2@34.25,8.24
SU_ONOFF: R79.1 R82.2 U1.2 | length 48
  Bottom w0.254: U1.2@42.247,41.749 41.149,41.749 40.9,41.5 40.9,40.47 47.1,34.27 47.1,30.45 44.25,27.6 44.25,14.7 44.821,14.13 46.171,14.13 47.6,12.7 47.6,9.157 43.6,5.157 R82.2@43.6,3.957 43.64,3.997 R79.1@43.64,5.397
SU_ONOFF2: IC38.3 Q13.1 Q14.1 R70.1 R79.2 | length 24.7
  Bottom w0.152: IC38.3@31.26,12.8 IC38.3@31.3,12.8 ; R79.2@43.626,7.117 R79.2@43.64,7.103 ; Q13.1@46.825,10.116 Q13.1@46.825,10.33
  Bottom w0.254: IC38.3@31.3,12.8 32.3,11.8 38.735,11.8 38.935,11.6 42.035,11.6 ; R70.1@41.95,7.117 43.626,7.117 43.826,7.117 Q13.1@46.825,10.116 ; Q14.1@43.175,10.36 43.175,10.46 42.035,11.6 ; Q13.1@46.825,10.33 45.555,11.6 42.035,11.6
SWCLK: J1.9 U1.49 | length 41.1
  Top w0.254: v1(49.6,32.5) 72.845,9.255 J1.9@72.845,8.755
  Bottom w0.254: v1(49.6,32.5) 51.6,34.5 51.6,39.306 51.619,39.325 U1.49@51.619,39.387
SWDIO: J1.8 U1.46 | length 56.5
  Top w0.254: v1(73.1,10.9) 73.6,10.9 74.095,10.405 J1.8@74.095,8.755
  Bottom w0.254: U1.46@53.473,42.257 54.443,42.257 55.8,40.9 55.8,34.3 50.9,29.4 50.9,26.4 52.4,24.9 57.6,24.9 59.9,22.6 70.9,22.6 73.1,20.4 v1(73.1,10.9)
TOP: IC11.3 R19.1 R21.2 TOP.1 TOP.4 | length 20.5
  Top w1: TOP.4@46.75,82.69 46.75,83.35 47.7,84.3 ; TOP.1@51.25,82.69 TOP.1@51.25,83.15 ; 47.7,84.3 47.7,84.1 50.3,84.1 TOP.1@51.25,83.15 ; 47.7,84.3 v1(49.6,86.2) v1(51.2,86.2) 51.25,86.15 TOP.1@51.25,83.15
  Bottom w0.75: IC11.3@47.8,84.8 IC11.3@47.9,84.7
  Bottom w1: IC11.3@47.9,84.7 49.55,84.7 R19.1@49.56,84.69 ; v1(49.6,86.2) 49.56,86.16 R19.1@49.56,84.69 ; v1(51.2,86.2) 51.24,86.16 R21.2@51.24,84.73 51.2,84.69 R19.1@49.56,84.69
TX: J1.2 U1.51 | length 46
  Top w0.254: v1(50.6,36.7) 51,36.7 72.945,14.755 76.945,14.755 81.595,10.105 J1.2@81.595,8.755
  Bottom w0.152: U1.51@50.6,39.383 U1.51@50.603,39.387
  Bottom w0.254: v1(50.6,36.7) U1.51@50.6,39.383
VBAT: C12.2 R3.1 R4.2 U1.15 | length 52.7
  Top w0.254: v1(20.5,74) 20.5,63.27 35.47,48.3 v1(36.5,48.3)
  Bottom w0.254: R4.2@11.92,72.79 13.13,74 v1(20.5,74) ; v1(36.5,48.3) 36.549,48.251 U1.15@42.247,48.251
  Bottom w0.5: R3.1@9.07,73.49 9.77,72.79 R4.2@11.92,72.79 11.92,72.338 12.268,71.99 12.668,71.59 C12.2@12.668,71.29
VCC: ANT.3 ANT.4 C26.2 C27.2 C28.2 C29.2 C30.2 C56.2 C57.2 D2.1 D3.1 D4.1 D5.1 D6.1 D7.1 DEPB.1 DEPL.1 DEPR.1 DEPT.1 HEATERS.3 HEATERS.4 IC8.2 IC12.2 IC16.2 IC20.2 IC28.4 IC37.5 IC38.2 IC39.2 IC40.2 IC41.2 Q1.3 Q2.3 Q3.3 Q4.3 Q5.3 Q6.3 Q7.3 Q8.3 R5.2 R16.2 R26.2 R36.2 R50.2 | length 599.4
  Top w2: v1(10.8,13.3) 13.9,13.3 16.3,10.9 40,10.9 ; v1(13.6,13.3) 13.6,13.8 13.8,14 13.8,42.1 ; v1(21.5,22.4) 21.5,27 22.7,28.2 22.7,33.2 v1(20.6,35.3) 13.8,42.1 ; v1(33.9,14.6) v1(36.3,14.6) 40,10.9 ; v1(52.7,9.8) v1(52.7,10.9) ; v1(65.6,6.2) v1(65.6,2.4) 63.7,2.4 DEPB.1@63.7,4.13 63.7,2.016 59.284,2.016 57.7,3.6 57.7,9.1 55.9,10.9 v1(52.7,10.9) ; v1@65.967,88.1 60.3,88.1 59.29,87.09 DEPT.1@59.29,85.92 58.49,85.92 50.37,77.8 v1(47.6,77.8) 41.869,83.531 14.566,83.531 11.8,80.765 11.8,58.5 v1(13.1,57.2) 13.8,56.5 13.8,42.1 ; v1@80.599,53.601 80.599,60.999 84.692,65.092 93.392,65.092 v1(93.4,65.1) v1(93.4,66.2) v1(93.4,67.3) v1(93.4,68.4) v1(93.4,69.6) 92.36,70.64 DEPR.1@89.67,70.64 ; 40,10.9 v1(52.7,10.9)
  Bottom w0.152: DEPL.1@3.53,44.18 6.24,44.18 D3.1@6.55,44.49 ; Q1.3@38.41,12.94 38.41,12.74 Q1.3@38.51,12.64 ; D2.1@59.29,83.78 D2.1@59.37,83.7
  Bottom w0.254: HEATERS.3@89.03,28.84 89.26,29.07 93.4,29.07
  Bottom w0.75: IC40.2@10.4,11.54 10.4,12.9 ; IC16.2@13.16,54.98 13.16,55.94 ; Q4.3@13.79,39.75 Q4.3@14.06,39.48 14.36,39.78 ; IC39.2@18.46,33.84 20.24,33.84 ; IC41.2@19.6,21.6 21.3,21.6 ; IC38.2@30.31,12.8 30.31,13.91 31,14.6 ; IC12.2@45.52,77.79 46.72,77.79 ; v1@52.7,11.01 IC8.2@54.34,11.01 ; IC20.2@80.54,56.11 80.563,56.088 80.563,54.637 v1(80.6,54.6) ; C29.2@90.864,75.1 C29.2@90.854,75.09 C29.2@91.054,75.09
  Bottom w1: C30.2@6.85,41.984 6.85,44.13 6.9,44.18 ; C28.2@8.034,13.35 10.75,13.35 v1(10.8,13.3) ; C26.2@8.134,49.25 8.8,49.916 8.8,51.7 8.7,51.6 8.7,52.105 R26.2@8.8,52.205 ; v1(11.9,58.4) v1(13.1,57.2) 13.16,57.14 13.16,55.94 ; v1@20.6,35.2 v1(20.6,35.3) ; IC28.4@26.19,34.03 IC28.4@26.37,34.21 ; 46.72,77.79 47.59,77.79 v1(47.6,77.8) v1(48.8,77.8) ; v1@48.79,77.79 v1(48.8,77.8) ; R16.2@48.865,79.05 48.865,77.865 v1(48.8,77.8) ; v1(52.7,9.8) v1(52.7,10.9) v1@52.7,11.01 ; v1(65.6,2.4) 68.155,2.4 C56.2@68.42,2.665 ; C57.2@69.18,87.685 69.595,88.1 71.8,88.1 ; v1(80.6,53.6) v1(80.6,54.6) ; IC37.5@83.09,13.74 IC37.5@83.29,13.94 ; C27.2@90.95,38.716 92.784,38.716 93.4,38.1 ; C29.2@91.054,75.09 93.064,75.09 93.4,75.426
  Bottom w1.5: 10.4,12.9 v1(10.8,13.3) v1(13.6,13.3) 14.2,13.3 14.51,12.99 Q6.3@14.51,12.59 14.51,13.29 17.48,13.29 Q5.3@18.21,12.56 ; Q7.3@13.95,26.23 Q7.3@14.01,26.17 Q7.3@14.11,26.27 ; 20.24,33.84 20.6,34.2 ; 24.106,32.513 26.112,32.513 R50.2@26.19,32.59 IC28.4@26.19,34.03 ; 30.81,14.41 31,14.6 32.73,14.6 ; Q2.3@34.16,12.87 34.16,13.17 32.73,14.6 ; Q1.3@38.41,12.94 36.78,14.57 36.75,14.6 v1(36.3,14.6) v1(33.9,14.6) 32.73,14.6 ; R5.2@57.335,6.5 57.435,6.5 R5.2@57.635,6.3 ; DEPB.1@63.7,4.13 63.72,4.11 D5.1@63.72,1.81 ; D6.1@72.85,79.89 72.98,80.02 ANT.4@72.98,82.53 ANT.3@72.98,84.53 72.98,87.88 73.2,88.1 ; D7.1@84.64,29.03 86.84,29.03 HEATERS.4@87.03,28.84 ; R36.2@86.3,54.925 R36.2@86.6,55.225
  Bottom w2: DEPL.1@3.53,44.18 6.9,44.18 7.88,44.18 8.7,45 ; 8.7,51.6 8.7,45 ; Q8.3@10.37,26.23 Q7.3@13.95,26.23 ; Q7.3@14.11,26.27 15.43,26.27 16.3,25.4 20.9,25.4 v1(21.5,26) ; 20.6,34.2 v1@20.6,35.2 ; v1(20.6,35.3) v1(19.5,36.4) 19.4,36.4 v1(18.5,37.3) v1(17.6,38.2) v1(16.8,39) 16.02,39.78 14.36,39.78 10.64,39.78 Q3.3@10.31,39.45 9.71,39.45 8.7,40.46 8.7,45 ; 21.3,21.6 21.5,21.8 v1(21.5,22.4) v1(21.5,23.6) v1(21.5,24.8) v1(21.5,26) ; 24.106,32.513 22.658,31.064 22.658,28.59 21.5,27.433 v1(21.5,26) ; R5.2@57.635,6.3 65.5,6.3 v1(65.6,6.2) v1(65.6,5.2) v1(65.6,4.2) v1(65.6,3.3) ; D2.1@59.29,83.78 DEPT.1@59.29,85.92 59.29,87.12 60.27,88.1 v1(60.5,88.1) v1(62,88.1) v1(63.3,88.1) v1(64.6,88.1) v1(66,88.1) 71.8,88.1 73.2,88.1 80.726,88.1 93.4,75.426 v1(93.4,69.6) v1(93.4,68.4) v1(93.4,67.3) v1(93.4,66.2) v1(93.4,65.1) 93.4,38.1 93.4,29.07 ; DEPB.1@63.7,4.13 64.7,3.13 65.6,3.13 v1(65.6,3.3) ; IC37.5@83.09,13.74 83.09,11.01 86.65,7.45 ; R36.2@86.6,55.225 86.6,62.225 84.84,63.985 84.84,69.44 85.04,69.64 D4.1@86.94,69.64 87.67,69.64 88.67,70.64 DEPR.1@89.67,70.64 ; HEATERS.4@87.03,28.84 HEATERS.3@89.03,28.84 93.4,28.84 93.4,15.15 ; 93.36,20.39 93.4,20.35 93.4,14.2 86.65,7.45 ; v1(65.6,3.3) v1(65.6,2.4) 65.68,2.32 81.52,2.32 86.65,7.45
VIN1: C6.2 R41.1 R42.2 U1.34 | length 45.2
  Bottom w0.152: R42.2@89.02,43.04 R42.2@89.08,42.98
  Bottom w0.254: U1.34@53.473,48.251 54.273,48.251 59.173,53.151 60.849,53.151 69.649,44.351 87.409,44.351 88.62,43.14 88.92,43.14 R42.2@89.02,43.04 88.98,43.08 R41.1@88.98,44.76 ; R42.2@89.08,42.98 89.548,42.512 C6.2@89.548,41.6
VIN2: C3.2 R31.1 R32.2 U1.8 | length 58.9
  Bottom w0.254: C3.2@5.692,62.2 5.692,61.198 R32.2@6.13,60.76 6.13,59.1 R31.1@6.12,59.09 6.72,59.09 13.23,65.6 26.6,65.6 28.2,64 28.2,51.03 35.084,44.146 38.247,44.146 38.847,44.746 U1.8@42.247,44.746
VIN3: C79.2 R21.1 R22.2 U1.22 | length 47.6
  Bottom w0.254: U1.22@46.615,50.613 46.6,50.629 46.6,61.8 55.5,70.7 59.1,70.7 59.8,71.4 59.8,81.1 57.672,83.228 C79.2@54.31,83.228 54.102,83.02 R22.2@52.91,83.02 52.9,83.03 R21.1@51.24,83.03
VIN4: C8.2 R11.1 R13.2 U1.36 | length 55.2
  Top w0.254: v1(53.5,37.7) 54.3,37.7 56.8,40.2 v1(56.8,47)
  Bottom w0.254: C8.2@45.74,4.452 46.762,4.452 R13.2@47.24,4.93 48.82,4.93 R11.1@48.86,4.97 48.66,5.17 48.66,13.54 46,16.2 46,26.7 53.5,34.2 v1(53.5,37.7) ; U1.36@53.473,47.261 54.839,47.261 55.3,46.8 56.8,46.8 v1(56.8,47)
VLCD: U1.1
pads on no net: BOTTOM.5 BOTTOM.6 IC1.1 IC2.1 IC8.1 IC12.1 IC16.1 IC20.1 IC38.1 IC39.1 IC40.1 IC41.1 J1.S1 J1.S2 LEFT.5 LEFT.6 RIGHT.5 RIGHT.6 TOP.5 TOP.6 U1.14 U1.24 U1.38 U1.42 U1.43 U1.50 U1.53 U1.54 U1.55 U1.56 U1.57 U1.58 U1.59 U1.62
copper on no net: | length 301.6
  Top w0.152: 8.08,8.89 ccw(c5.08,8.89) 8.08,8.89 ; 8.08,82.55 ccw(c5.08,82.55) 8.08,82.55 ; 36.01,33.98 ccw(c33.01,33.98) 36.01,33.98 ; 36.01,55.98 ccw(c33.01,55.98) 36.01,55.98 ; 66.01,33.98 ccw(c63.01,33.98) 66.01,33.98 ; 66.01,55.98 ccw(c63.01,55.98) 66.01,55.98 ; 93.81,5.08 ccw(c90.81,5.08) 93.81,5.08 ; 93.81,85.09 ccw(c90.81,85.09) 93.81,85.09
  Bottom w0.152: 8.08,8.89 ccw(c5.08,8.89) 8.08,8.89 ; 8.08,82.55 ccw(c5.08,82.55) 8.08,82.55 ; 36.01,33.98 ccw(c33.01,33.98) 36.01,33.98 ; 36.01,55.98 ccw(c33.01,55.98) 36.01,55.98 ; 66.01,33.98 ccw(c63.01,33.98) 66.01,33.98 ; 66.01,55.98 ccw(c63.01,55.98) 66.01,55.98 ; 93.81,5.08 ccw(c90.81,5.08) 93.81,5.08 ; 93.81,85.09 ccw(c90.81,85.09) 93.81,85.09

## Polygon pours and split planes (outlines as drawn)
GND on Bottom "Polygon_1_Net_GND" (solid, remove dead copper, pour order 1): 0.073,90.127 0.073,0.073 95.827,0.073 95.827,90.127
GND on Top "Polygon_2_Net_GND" (solid, remove dead copper, pour order 0): 0.073,90.127 0.073,0.073 95.827,0.073 95.827,90.127

## Keep-outs
Keep-Out Layer:
  the board outline again, w0

## Silkscreen, mask and mechanical layers (free items; w line width, h text height)
Dimension:
  the board outline again, w0
bPlace:
  text "UCI CubeSat" at 55.875,63.318 h3.1
  text "ANTSAT" at 51.81,60.318 h3.1
  text "EPS 2021" at 53.355,57.318 h3.1

## Dimensions
95.885,90.17 to 95.885,0 on Top
0,0 to 95.885,0 on Top

## Text inside footprints (layer, text, board x,y; h text height)
ANT: tPlace "4" at 71.189,83.165 h1.97 r180; tPlace "3" at 71.189,85.165 h1.97 r180; tPlace "2" at 77.8,83.165 h1.97 r180; tPlace "1" at 77.8,85.165 h1.97 r180; tDocu "4" at 71.189,83.165 h1.97 r180; tDocu "3" at 71.189,85.165 h1.97 r180; tDocu "2" at 77.8,83.165 h1.97 r180; tDocu "1" at 77.8,85.165 h1.97 r180
HEATERS: tPlace "4" at 87.665,30.631 h1.97 r90; tPlace "3" at 89.665,30.631 h1.97 r90; tPlace "2" at 87.665,24.02 h1.97 r90; tPlace "1" at 89.665,24.02 h1.97 r90; tDocu "4" at 87.665,30.631 h1.97 r90; tDocu "3" at 89.665,30.631 h1.97 r90; tDocu "2" at 87.665,24.02 h1.97 r90; tDocu "1" at 89.665,24.02 h1.97 r90
J1: tPlace "1" at 82.82,10.03 h0.94; tPlace "10" at 71.22,10.03 h0.94; tDocu "10" at 71.22,10.03 h0.94; tDocu "1" at 82.82,10.03 h0.94
UMB: tPlace "4" at 6.185,64.739 h1.97 r270; tPlace "3" at 4.185,64.739 h1.97 r270; tPlace "2" at 6.185,71.35 h1.97 r270; tPlace "1" at 4.185,71.35 h1.97 r270; tDocu "4" at 6.185,64.739 h1.97 r270; tDocu "3" at 4.185,64.739 h1.97 r270; tDocu "2" at 6.185,71.35 h1.97 r270; tDocu "1" at 4.185,71.35 h1.97 r270